# Altium PCB altium.PcbDoc (part 2 of 2)
Units mil, origin at the board's own origin, x right, y up, seen from the top; angles counter-clockwise.
Board outline 5119.1 x 2638.79 mil, 6 copper layers (TOP, L2_GND, L3_SIG, L4_VCC, L5_GND, BOTTOM), stack 61 mil thick; 336 components, 316 nets, 1351 pads, 0 vias.
Unrouted connection lines stored in the file: 850.
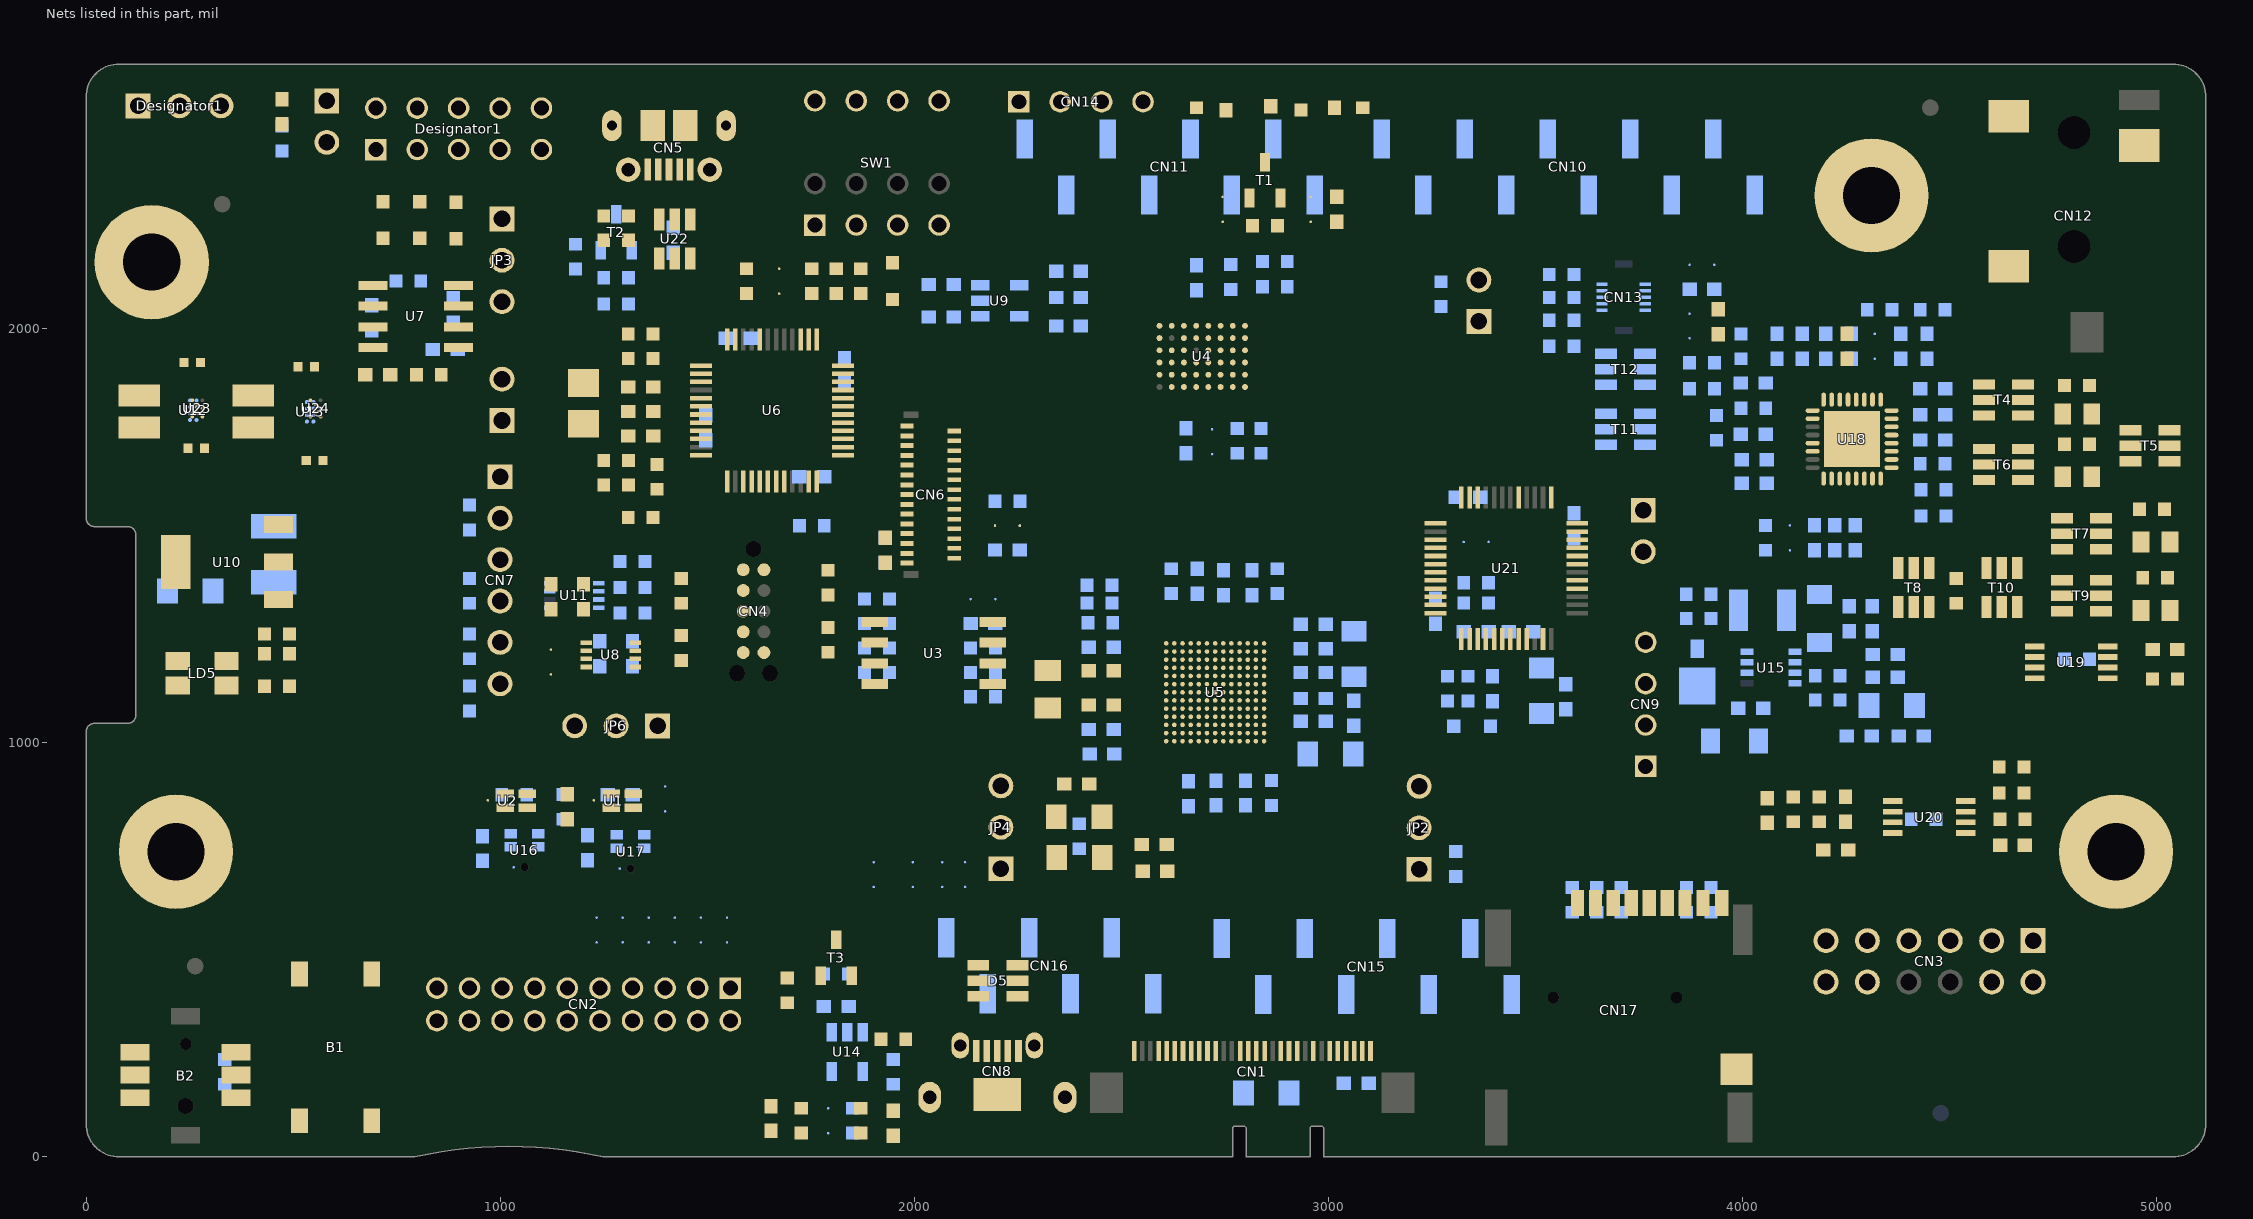
[diagram p2: the nets of this part, all layers, seen from the top]

## Footprints (in the part's own frame and the unit in brackets; to place one, negate y for a bottom-side part, rotate by r counter-clockwise, add the part's x,y. Pads: shape width x height; smd on the part's side, far side on the other; paste and mask are expansions set on the pad) (continued)
XTAL_2SM_3R2X2R5 [mil] "XTAL_2SM_3R2X2R5"
  rect 67x75 smd: 1(-49.21,0) 2(49.21,0)
  body extent -85,-50 85,50, height 150

## Part data
B1: library part "SW PUSHBUTTON", "SE Push Button TD-0341 [RESET/Black]", Manuf_1=Chau-hua, Manuf_2=wealthmetal, Manuf_Part_1=CTSM-644N-V-T/R, Assembly="with Back cap", ECCN_US/EU=NA, Manuf_Part_2=TD-0341X-A00, Ordered by=Subcon, Silkscreen=RESET
B2: library part MT-008A, "Joystick", Manuf_1=XIEJIA, Assembly="with button", ECCN_US/EU=NA, Manuf_Part_1=MT008-A, Ordered by=Subcon, Silkscreen=Joystick
C1 C2 C4 C5 C7 C10 C12 C14 C15 C16 C17 C18 C21 C22 C24 C25 C26 C27 C28 C29 C30 C31 C33 C34 C44 C46 C51 C58 C59 C60 C66 C71 C72 C73 C80 C81 C82 C83 C85 C86 C87 C88 C89 C90 C92 C93 C94 C95 C96 C97 C98 C101 C102 C103 C104 C105: library part Cap, "Capacitor,100nF,10%,16V,X7R,0603,YAGEO", Manuf_1=YAGEO, Manuf_Part_1=CC0603KRX7R7BB104, Ordered by=Subcon, Published=8-Jun-2000, Publisher="Altium Limited", Revision="July-2002: Re-released for DXP Platform."
C3 C62 C63 C99: library part Cap, "Capacitor,100nF,10%,16V,X7R,0603,YAGEO", Manuf_1=YAGEO, Manuf_Part_1=CC0603KRX7R7BB104, Ordered by=Subcon, Published=8-Jun-2000, Publisher="Altium Limited", Revision="July-2002: Re-released for DXP Platform."
C6: library part "Cap Pol1", "TAN Capacitor,4.7uF,10%,16V,A Type,AVX", Manuf_1=AVX, ECCN_US/EU=NA, Manuf_Part_1=TAJA475K016R, Ordered by=Subcon, Published=8-Jun-2000, Publisher="Altium Limited", Revision="July-2002: Re-released for DXP Platform."
C8 C13 C91 C100: library part "Cap Pol1", "Tan Capacitor,1uF,10%,16V,Tan-A,TAJA105K016R", Manuf_1=AVX, ECCN_US/EU=NA, Manuf_Part_1=TAJA105K016R, Ordered by=Subcon, Published=8-Jun-2000, Publisher="Altium Limited", Revision="July-2002: Re-released for DXP Platform."
C9 C11: library part Cap, "Capacitor,5.6pF,0.25P,50V,NPO,0603", Manuf_1=YAGEO, Ordered by=Subcon, Published=8-Jun-2000, Publisher="Altium Limited", Revision="July-2002: Re-released for DXP Platform."
C19 C32 C35 C67 C69 C70 C74 C77 C78 C79 C84: library part Cap, "Capacitor,1uF,0603,16V,10%,X5R,YAGEO", Manuf_1=YAGEO, Manuf_Part_1=CC0603KRX5R7BB105, Ordered by=Subcon, Published=8-Jun-2000, Publisher="Altium Limited", Revision="July-2002: Re-released for DXP Platform."
C20 C23: library part Cap, "Capacitor,10pF,5%,50V,NPO,0603,YAGEO", Manuf_1=YAGEO, Manuf_Part_1=CC0603JRNPO9BN100, Ordered by=Subcon, Published=8-Jun-2000, Publisher="Altium Limited", Revision="July-2002: Re-released for DXP Platform."
C36 C47 C57: library part Cap, "Capacitor,10nF,0603,50V,10%,X7R,YAGEO;", Manuf_1=YAGEO, Manuf_Part_1=CC0603KRX7R9BB103, Ordered by=Subcon, Published=8-Jun-2000, Publisher="Altium Limited", Revision="July-2002: Re-released for DXP Platform."
C37 C55 C61: library part "Cap Pol1", "TAN Capacitor,10uF,10%,16V,A Type,AVX", Manuf_1=AVX, ECCN_US/EU=NA, Manuf_Part_1=TAJA106K016R, Ordered by=Subcon, Published=8-Jun-2000, Publisher="Altium Limited", Revision="July-2002: Re-released for DXP Platform."
C40 C41 C42 C43: library part Cap, "Capacitor,10uF,0402,GRM155R60J106ME11", Manuf_1=Murata, Manuf_Part_1=GRM155R60J106ME11, Ordered by=Subcon, Published=8-Jun-2000, Publisher="Altium Limited", Revision="July-2002: Re-released for DXP Platform."
C45: library part "Cap Pol1", "Tan Capacitor,10uF,10%,25V,Tan-B,TAJB106K025RNJ", Manuf_1=AVX, ECCN_US/EU=NA, Manuf_Part_1=TAJB106K025RNJ, Ordered by=Subcon, Published=8-Jun-2000, Publisher="Altium Limited", Revision="July-2002: Re-released for DXP Platform."
C48: library part CAP, "Capacitor,4.7uF,50V,X7R,10%,1206", Manuf_1=YAGEO, ECCN_US/EU=NA, Manuf_Part_1=CC1206KKX7R9BB475, Ordered by=Subcon, Published=8-Jun-2000, Publisher="Altium Limited", Revision="July-2002: Re-released for DXP Platform."
C54: library part Cap, "Capacitor,4.7uF,16V, X5R,10%,0603", Manuf_1=YAGEO, Manuf_Part_1=CC0603KRX5R7BB475, Ordered by=Subcon, Published=8-Jun-2000, Publisher="Altium Limited", Revision="July-2002: Re-released for DXP Platform."
C56: library part "Cap Pol1", "Capacitor,4.7uF,±10%,X7R,10V,1206,GRM31CR71A475KA01L", Manuf_1=Murata, ECCN_US/EU=NA, Manuf_Part_1=GRM31CR71A475KA01L, Ordered by=Subcon, Published=8-Jun-2000, Publisher="Altium Limited", Revision="July-2002: Re-released for DXP Platform."
C64 C65: library part Cap, "Capacitor,150pF,0603,50V,5%,NPO", Manuf_1=YAGEO, ECCN_US/EU=NA, Manuf_Part_1=CC0603JRNPO9BN151, Ordered by=Subcon, Published=8-Jun-2000, Publisher="Altium Limited", Revision="July-2002: Re-released for DXP Platform."
C68: library part Cap, "Capacitor,10uF,10%,10V,X5R,0603,C1608X5R1A106KT000E", Manuf_1=TDK, ECCN_US/EU=NA, Manuf_Part_1=C1608X5R1A106KT000E, Ordered by=Subcon, Published=8-Jun-2000, Publisher="Altium Limited", Revision="July-2002: Re-released for DXP Platform."
C75 C76: library part Cap, "Capacitor,22nF,10%,25V,X7R,0603", Manuf_1=YAGEO, ECCN_US/EU=NA, Manuf_Part_1=CC0603KRX7R8BB223, Ordered by=Subcon, Published=8-Jun-2000, Publisher="Altium Limited", Revision="July-2002: Re-released for DXP Platform."
CN1: "TOWNES -  Connector FFC/FPC ZIF 0.5mm 30 pins, Lower Contacts", Manuf_1=TOWNES, Manuf_Part_2=TFP-A330ZH-BT1-ECX, Distrib="Sub Co", ECCN_US/EU=n/a, Manuf_2=TOWNES, Manuf_Part_1=FPU330ZH-BT1D3-CA, Ordered by=Subcon
CN2: library part "Header 10X2A", "Header, 10-Pin, Dual row", Manuf_1=ATOM, Manuf_Part_1=FH200210C-12000, Ordered by=Subcon
CN3: library part "Header 6X2A", "Header, 6-Pin, Dual row", Manuf_1=ATOM, Manuf_Part_1=FH254206C-1600, Ordered by=Subcon
CN4: "Footprint for TC2050-IDC-430 plug of nails (TM) cable for MP430", Manuf_1=None, Manuf_Part_1=None, Revision="17-Jul-2002: Re-released for DXP Platform."
CN5 CN8: Manuf_1=MOLEX, ECCN_US/EU=NA, Ordered by=Subcon
  CN5: Manuf_Part_1=1050170001, Silkscreen=USB
  CN8: Manuf_Part_1=475900001, Silkscreen=USB_USER
CN6: "29pins FPC connector", Manuf_1=Hirose, ECCN_US/EU=NA, Manuf_Part_1=FH26-29S-0.3SHW, Ordered by=Subcon
CN7: library part "Header 6", "Header, 6-Pin", Manuf_1=lyconn, ECCN_US/EU=NA, LatestRevisionDate=17-Jul-2002, LatestRevisionNote="Re-released for DXP Platform.", Manuf_Part_1=313106S111116, Ordered by=Subcon, Publisher="Altium Limited", Silkscreen=SWD
CN9 CN14: library part "Header 4", "Header, 4-Pin", ECCN_US/EU=[N/A], Publisher="Altium Limited", Revision="17-Jul-2002: Re-released for DXP Platform.", SOFER_FP=HDR_1X4_2R54
  CN9: Ordered by=Subcon
CN10: library part "Header 10X1_Female", "Header, 10-Pin, Single row,female", Manuf_1=SAMTEC, ECCN_US/EU=NA, LatestRevisionDate=17-Jul-2002, LatestRevisionNote="Re-released for DXP Platform.", Manuf_Part_1=SSW-110-22-X-S-VS, Ordered by=Subcon, Publisher="Altium Limited"
CN11 CN15: library part "Header 8X1_Female", "Header, 8-Pin, Single row,female", Manuf_1=SAMTEC, ECCN_US/EU=NA, LatestRevisionDate=17-Jul-2002, LatestRevisionNote="Re-released for DXP Platform.", Manuf_Part_1=SSW-108-22-X-S-VS, Ordered by=Subcon, Publisher="Altium Limited"
CN12: Manuf_1=QIAOD, ECCN_US/EU=NA, Manuf_Part_1=PJ3028B-3, Ordered by=Subcon, Silkscreen=AUDIO_JACK
CN13: library part "Header 5X2A", "Header, 5-Pin, Dual row", Manuf_1=Hirose, ECCN_US/EU=NA, LatestRevisionDate=17-Jul-2002, LatestRevisionNote="Re-released for DXP Platform.", Manuf_Part_1="DF37NB-10DS-0.4V (5x)", Ordered by=Subcon, Publisher="Altium Limited"
CN16: library part "Header 6X1_Female", "Header, 6-Pin, Single row,female", Manuf_1=SAMTEC, ECCN_US/EU=NA, LatestRevisionDate=17-Jul-2002, LatestRevisionNote="Re-released for DXP Platform.", Manuf_Part_1=SSW-106-22-X-S-VS, Ordered by=Subcon, Publisher="Altium Limited"
CN17: library part SMS016AFA5E, Manuf_1=Yamaichi, ECCN_US/EU=NA, Manuf_Part_1=PJS008-2000, Ordered by=Subcon, Silkscreen=uSD
D1 D3 D6 U22: Manuf_1=STM, Ordered by=STM
  D1 D3 D6: Distrib=ST, ECCN_US/EU=EAR99/NEC, Manuf_Part_1=BAT60JFILM, Order=BAT60JFILM, Provided=STM, Ref St=9151097, Revision="July-2002: Re-released for DXP Platform."
  U22: Manuf_Part_1=USBLC6-2SC6
D2 D4: library part BAT60JFILM, "BAT60JFILM", Manuf_1=STM, ECCN_US/EU=EAR99/NEC, Manuf_Part_1=BAT60JFILM, Order=BAT60JFILM, Ordered by=STM, Provided=STM, Ref St=9151097, Revision="July-2002: Re-released for DXP Platform."
  D2: Distrib=ST
  D4: Distrib=STM
D5: "4-line ESD protection", Manuf_1=STM, Manuf_Part_1=ESDA5V3L, Distrib=ST, ECCN_US/EU=EAR99/NEC, Order=ESDA5V3L, Ordered by=STM, Provided=ST, Ref St=9179034
Designator1 JP9 JP10: library part JP2, Manuf_1=lyconn, Manuf_Part_1=313102S111116, Assembly="with jumper", ECCN_US/EU=NA, Ordered by=Subcon
Designator1 JP3 JP6: library part Jumper3, Manuf_1=lyconn, Manuf_Part_1=313103S111116, Ordered by=Subcon
  Designator1 JP3: ECCN_US/EU=NA, Silkscreen="+3V3: pins 1&2 +1V8: pins 2&3"
Designator1: library part "Header 5X2M", "Pin Header male,2.54mm,2*5,L=11.6,180,1U,DIP", Manuf_1=Lyconn, Distrib="Sub Co", ECCN_US/EU=n/a, Ordered by=Subcon, SOFER_FP=HDR_2X5_2R54
Designator1: library part LED2, "LED,Orange,0603", Manuf_1=Everlight, Corlor=Orange, ECCN_US/EU=EAR99/NEC, Manuf_Part_1=19-217/S2C-AM2N2VY/3T, Ordered by=Subcon, Published=8-Jun-2000, Publisher="Altium Limited", Revision="July-2002: Re-released for DXP Platform."
Designator1 LD3 LD6 LD8: library part LED2, "LED,Green,0603", Manuf_1=Everlight, Corlor=Green, ECCN_US/EU=EAR99/NEC, Manuf_Part_1=19-213SY6C/S530-E2/TR8LED, Ordered by=Subcon, Published=8-Jun-2000, Publisher="Altium Limited", Revision="July-2002: Re-released for DXP Platform."
  LD8: Silkscreen=PWR
JP1: library part JP2, "2 PIN Jumper", Manuf_1=lyconn, Manuf_Part_1=313102S111116, Assembly="with jumper", ECCN_US/EU=[N/A], Ordered by=Subcon
JP2: library part Jumper3, "Jumper 3 pins", Manuf_1=lyconn, Manuf_Part_1=313103S111116, ECCN_US/EU=n/a, Ordered by=Subcon
JP4: Manuf_1=lyconn, Manuf_Part_1=313103S111116, ECCN_US/EU=NA, Ordered by=Subcon
L1 L4 L5 L6: library part Inductor, "100uH Bead", Manuf_1=Tai-tech, ECCN_US/EU=NA, Manuf_Part_1=FCM1608KF-601T03, Ordered by=Subcon, Published=8-Jun-2000, Publisher="Altium Limited", Revision="July-2002: Re-released for DXP Platform."
L2 L3: library part Inductor, "Inductor", Manuf_1=TDK, Manuf_Part_1=VLS252010HBX-2R2M-1, ECCN_US/EU=NA, Ordered by=Subcon, Published=8-Jun-2000, Publisher="Altium Limited", Revision="July-2002: Re-released for DXP Platform."
L7: library part Inductor, "IND,4.7uH,1A,1210,LQH32PN4R7NN0L", Manuf_1=Murata, ECCN_US/EU=NA, Manuf_Part_1=LQH32PN4R7NN0L, Ordered by=Subcon, Published=8-Jun-2000, Publisher="Altium Limited", Revision="July-2002: Re-released for DXP Platform."
L8: library part BEAD_600R_350MA_0603, "Bead,600R,350mA,0603,FCM1608KF-601T03,Tai-tech", Manuf_1=Tai-tech, Manuf_2=TDK, Manuf_Part_2=MPZ1608S300A, Comment_1=bead,30R,5A,0603,MPZ1608S300A,TDK, Manuf_Part_1=FCM1608KF-601T03, Order=FCM1608KF-601T03, Ordered by=Subcon, Revision="July-2002: Re-released for DXP Platform."
LD4 LD7: library part LED2, "LED, Red ,0603", Manuf_1=Everlight, Corlor=Red, ECCN_US/EU=EAR99/NEC, Manuf_Part_1=19-217/R6C-AL1M2VY/3T, Ordered by=Subcon, Published=8-Jun-2000, Publisher="Altium Limited", Revision="July-2002: Re-released for DXP Platform."
  LD4: Silkscreen=Fault
LD5: library part LD_BICOLOR_CMS, "Bicolor Led", Manuf_1="Avago Technologies", Manuf_2=everluck, Manuf_Part_2=LE-RGW35280, Distrib=RADIOSPARES, ECCN_US/EU=EAR99/NEC, Manuf_Part_1=HSMF-A201-A00J1, Ordered by=Subcon, Silkscreen=COM
R1: library part res1, "Resistor,680R,0603,1%,YAGEO", Manuf_1=YAGEO, ECCN_US/EU=NA, Manuf_Part_1=RC0603FR-07680RL, Ordered by=Subcon, Published=8-Jun-2000, Publisher="Altium Limited", Revision="July-2002: Re-released for DXP Platform."
R2 R112: library part res1, "Resistor,510R,0603,1%,YAGEO", Manuf_1=YAGEO, ECCN_US/EU=NA, Manuf_Part_1=RC0603FR-07510RL, Ordered by=Subcon, Published=8-Jun-2000, Publisher="Altium Limited", Revision="July-2002: Re-released for DXP Platform."
R4 R5 R16 R25 R35 R56 R59 R60 R63 R66 R69 R71 R102: library part res1, "Resistor, 100 ,0603,1%,YAGEO", Manuf_1=YAGEO, ECCN_US/EU=NA, Manuf_Part_1=RC0603JR-07100RL, Ordered by=Subcon, Published=8-Jun-2000, Publisher="Altium Limited", Revision="July-2002: Re-released for DXP Platform."
R6 R7 R8 R26 R28 R29 R100: library part res1, "Resistor, 22 ,0603,1%,YAGEO", Manuf_1=YAGEO, ECCN_US/EU=NA, Manuf_Part_1=RC0603JR-0722RL, Ordered by=Subcon, Published=8-Jun-2000, Publisher="Altium Limited", Revision="July-2002: Re-released for DXP Platform."
R12 R18 R130: library part res1, "Resistor, 0 ,0603,1%,YAGEO", Manuf_1=YAGEO, Manuf_Part_1=RC0603JR-070RL, ECCN_US/EU=NA, Ordered by=Subcon, Published=8-Jun-2000, Publisher="Altium Limited", Revision="July-2002: Re-released for DXP Platform."
R13 R14 R15 R17 R20 R33 R48 R52 R53 R54 R73 R76 R81 R84 R94 R106 R109 R110 R115 R116 R117: library part res1, "Resistor,100K,0603,1%,YAGEO", Manuf_1=YAGEO, ECCN_US/EU=NA, Manuf_Part_1=RC0603FR-07100KL, Ordered by=Subcon, Published=8-Jun-2000, Publisher="Altium Limited", Revision="July-2002: Re-released for DXP Platform."
R21 R31 R41 R77 R89 R99 R104: library part res1, "Resistor,100K,0603,1%,YAGEO", Manuf_1=YAGEO, Manuf_Part_1=RC0603FR-07100KL, Ordered by=Subcon, Published=8-Jun-2000, Publisher="Altium Limited", Revision="July-2002: Re-released for DXP Platform."
  R21 R77 R89 R99 R104: ECCN_US/EU=NA
  R31 R41: ECCN_US/EU=[N/A]
R22 R45 R49: library part res1, "Resistor,4.7K,0603,1%,YAGEO", Manuf_1=YAGEO, ECCN_US/EU=NA, Manuf_Part_1=RC0603FR-074K7L, Ordered by=Subcon, Published=8-Jun-2000, Publisher="Altium Limited", Revision="July-2002: Re-released for DXP Platform."
R23: library part res1, "Resistor,2.7K,0603,1%,YAGEO", Manuf_1=YAGEO, ECCN_US/EU=NA, Manuf_Part_1=RC0603FR-072K7L, Ordered by=Subcon, Published=8-Jun-2000, Publisher="Altium Limited", Revision="July-2002: Re-released for DXP Platform."
R24: library part Res_0_5%_0402, "Resistor,0,0603,5%,YAGEO", Manuf_1=YAGEO, Manuf_Part_1=RC0603JR-070RL, Distrib=FARNELL, ECCN_US/EU=[N/A], Ordered by=Subcon
R27 R30 R32 R44 R78 R83 R91 R113: library part res1, "Resistor,10K,0603,1%,YAGEO", Manuf_1=YAGEO, ECCN_US/EU=NA, Manuf_Part_1=RC0603FR-0710KL, Ordered by=Subcon, Published=8-Jun-2000, Publisher="Altium Limited", Revision="July-2002: Re-released for DXP Platform."
R34: library part res1, "Resistor,36K,0603,1%,YAGEO", Manuf_1=YAGEO, ECCN_US/EU=NA, Manuf_Part_1=RC0603FR-0736KL, Ordered by=Subcon, Published=8-Jun-2000, Publisher="Altium Limited", Revision="July-2002: Re-released for DXP Platform."
R36 R68: library part res1, "Resistor", Manuf_1=YAGEO, Manuf_Part_1=RC0603FR-07820RL, ECCN_US/EU=NA, Ordered by=Subcon, Published=8-Jun-2000, Publisher="Altium Limited", Revision="July-2002: Re-released for DXP Platform."
R37 R42 R43: library part res1, "Resistor,1.5K,0603,1%,YAGEO", Manuf_1=YAGEO, ECCN_US/EU=NA, Manuf_Part_1=RC0603FR-071K5L, Ordered by=Subcon, Published=8-Jun-2000, Publisher="Altium Limited", Revision="July-2002: Re-released for DXP Platform."
R46 R47 R51 R55 R57 R70 R80 R93 R105 R114 R129: library part res1, "Resistor, 0 ,0603,1%,YAGEO", Manuf_1=YAGEO, ECCN_US/EU=NA, Manuf_Part_1=RC0603JR-070RL, Ordered by=Subcon, Published=8-Jun-2000, Publisher="Altium Limited", Revision="July-2002: Re-released for DXP Platform."
R50 R82: library part res1, "Resistor,2.2K,0603,1%,YAGEO", Manuf_1=YAGEO, ECCN_US/EU=NA, Manuf_Part_1=RC0603FR-072K2L, Ordered by=Subcon, Published=8-Jun-2000, Publisher="Altium Limited", Revision="July-2002: Re-released for DXP Platform."
R58 R62 R64: library part res1, "Resistor, 47K,0603,1%,YAGEO", Manuf_1=YAGEO, ECCN_US/EU=NA, Manuf_Part_1=RC0603JR-0747KL, Ordered by=Subcon, Published=8-Jun-2000, Publisher="Altium Limited", Revision="July-2002: Re-released for DXP Platform."
R65: library part res1, "Resistor, 10K,0603,1%,YAGEO", Manuf_1=YAGEO, ECCN_US/EU=NA, Manuf_Part_1=RC0603JR-0710KL, Ordered by=Subcon, Published=8-Jun-2000, Publisher="Altium Limited", Revision="July-2002: Re-released for DXP Platform."
R67: library part res1, "Resistor,10R,0603,1%,YAGEO", Manuf_1=YAGEO, ECCN_US/EU=NA, Manuf_Part_1=RC0603FR-0710RL, Ordered by=Subcon, Published=8-Jun-2000, Publisher="Altium Limited", Revision="July-2002: Re-released for DXP Platform."
R72: library part res1, "Resistor,1K,0603,1%", Manuf_1=YAGEO, Manuf_Part_1=RC0603FR-071KL, ECCN_US/EU=NA, Ordered by=Subcon, Published=8-Jun-2000, Publisher="Altium Limited", Revision="July-2002: Re-released for DXP Platform."
R74: library part res1, "Resistor, 330R , 0603,1%,YAGEO", Manuf_1=YAGEO, ECCN_US/EU=NA, Manuf_Part_1=RC0603JR-07330RL, Ordered by=Subcon, Published=8-Jun-2000, Publisher="Altium Limited", Revision="July-2002: Re-released for DXP Platform."
R75: library part res1, "Resistor, 620R , 0603,1%,YAGEO", Manuf_1=YAGEO, ECCN_US/EU=NA, Manuf_Part_1=RC0603JR-07620RL, Ordered by=Subcon, Published=8-Jun-2000, Publisher="Altium Limited", Revision="July-2002: Re-released for DXP Platform."
R79: library part res1, "Resistor,10K,0603,1%,YAGEO", Manuf_1=YAGEO, Manuf_Part_1=RC0603FR-0710KL, ECCN_US/EU=[N/A], Ordered by=Subcon, Published=8-Jun-2000, Publisher="Altium Limited", Revision="July-2002: Re-released for DXP Platform."
R85: library part Res_1_1%_0805, "Resistor,1,0805,1%,YAGEO", Manuf_1=YAGEO, Manuf_Part_1=RC0805FR-071RL, ECCN_US/EU=n/a, Order=RC0805FR-071RL, Ordered by=Subcon
R86 R90: library part res1, "Resistor,50R,0603,1%,YAGEO", Manuf_1=YAGEO, ECCN_US/EU=NA, Manuf_Part_1=RC0603FR-0750RL, Ordered by=Subcon, Published=8-Jun-2000, Publisher="Altium Limited", Revision="July-2002: Re-released for DXP Platform."
R87 R88: library part res1, "Resistor,1.5K,0603,1%,YAGEO", Manuf_1=YAGEO, Manuf_Part_1=RC0603FR-071K5L, ECCN_US/EU=NA, Ordered by=Subcon, Published=8-Jun-2000, Publisher="Altium Limited", Revision="July-2002: Re-released for DXP Platform."
R92 R96: library part res1, "Resistor,6.04K,0603,1%,YAGEO", Manuf_1=YAGEO, ECCN_US/EU=NA, Manuf_Part_1=RC0603FR-076K04L, Ordered by=Subcon, Published=8-Jun-2000, Publisher="Altium Limited", Revision="July-2002: Re-released for DXP Platform."
R95: library part Res_10K_1%_0805, "Resistor,10K,0805,1%,YAGEO", Manuf_1=YAGEO, Manuf_Part_1=RC0805FR-0710KL, ECCN_US/EU=n/a, Order=RC0805FR-0710KL, Ordered by=Subcon
R97 R103: library part res1, "Resistor,300K,0603,1%,YAGEO", Manuf_1=YAGEO, ECCN_US/EU=NA, Manuf_Part_1=RC0603FR-07300KL, Ordered by=Subcon, Published=8-Jun-2000, Publisher="Altium Limited", Revision="July-2002: Re-released for DXP Platform."
R98: library part res1, "Resistor,11K,0603,1%,YAGEO", Manuf_1=YAGEO, ECCN_US/EU=NA, Manuf_Part_1=RC0603FR-0711KL, Ordered by=Subcon, Published=8-Jun-2000, Publisher="Altium Limited", Revision="July-2002: Re-released for DXP Platform."
R101: library part res1, "Resistor,357K,0603,1%,YAGEO", Manuf_1=YAGEO, ECCN_US/EU=NA, Manuf_Part_1=RC0603FR-07357KL, Ordered by=Subcon, Published=8-Jun-2000, Publisher="Altium Limited", Revision="July-2002: Re-released for DXP Platform."
R107: library part Res_24_1%_0805, "Resistor,24,0805,1%,YAGEO", Manuf_1=YAGEO, Manuf_Part_1=RC0805FR-0724RL, ECCN_US/EU=n/a, Order=RC0805FR-0724RL, Ordered by=Subcon
R111: library part Res_620_1%_0805, "Resistor,620,0805,1%,YAGEO", Manuf_1=YAGEO, Manuf_Part_1=RC0805FR-07620RL, ECCN_US/EU=n/a, Order=RC0805FR-07620RL, Ordered by=Subcon
R118 R119 R120 R121 R122: library part res1, "Resistor,47K,0603,1%,YAGEO", Manuf_1=YAGEO, Manuf_Part_1=RC0603FR-0747KL, ECCN_US/EU=NA, Ordered by=Subcon, Published=8-Jun-2000, Publisher="Altium Limited", Revision="July-2002: Re-released for DXP Platform."
R123: library part res1, "Resistor, 510R , 0603,1%,YAGEO", Manuf_1=YAGEO, ECCN_US/EU=NA, Manuf_Part_1=RC0603JR-07510RL, Ordered by=Subcon, Published=8-Jun-2000, Publisher="Altium Limited", Revision="July-2002: Re-released for DXP Platform."
R124: library part res1, "Resistor, 1M , 0603", ECCN_US/EU=NA, Ordered by=Subcon, Published=8-Jun-2000, Publisher="Altium Limited", Revision="July-2002: Re-released for DXP Platform."
SB1 SB3 SB6 SB7 SB8 SB12 SB13 SB14 SB16 SB17 SB18 SB19 SB20 SB21 SB24 SB26 SB28: library part SB_ON, Manuf_1=YAGEO, Manuf_Part_1=RC0603JR-070RL, ECCN_US/EU=N/A, Ordered by=Subcon, Revision="July-2002: Re-released for DXP Platform.", Solder=YES
SB2 SB4 SB5 SB9 SB11 SB15 SB22 SB25 SB27: library part SB_OFF, ECCN_US/EU=N/A, Revision="July-2002: Re-released for DXP Platform.", Solder=NO
SW1: "Gold Plated Contacts,4PST,1x4 Switch", Manuf_1="Grayhill Inc", Manuf_Part_1=EDG-501S, Ordered by=Subcon, Second Source=NDS-04-V
T1: library part 2N7000, Manuf_1=NXP, ECCN_US/EU=N/A, Manuf_Part_1=BSN20BK, Ordered by=Subcon
T2 T3: library part NPN, "NPN Bipolar Transistor", Manuf_Part_1=MMBT9013, Code - JEDEC=TO-226-AA, ECCN_US/EU=EAR99/NEC, Ordered by=Subcon, Published=8-Jun-2000, Publisher="Altium Limited", Revision="July-2002: Re-released for DXP Platform."
T4 T5 T6 T7 T8 T9 T10 T11 T12: "STripFET VII DeepGATE Power MOSFET, P-CHANNEL 20 V, 0.0146, 7 A - SOT23-6L", Manuf_1=STM, Distrib=ST, ECCN_US/EU=EAR99/NEC, Manuf_Part_1=STT7P2UH7, Order=STT7P2UH7, Ordered by=STM, Provided=ST, Ref St=xxxxxxxx
  T4: Comments="exclusive with T8"
  T5 T6 T8 T10 T11 T12: Comments="exclusive with T2"
  T7: Comments="exclusive with T3"
  T9: Comments="exclusive with T4"
U1 U2: library part MP34DT01TR, "MEMS audio sensor", Manuf_1=STM, ECCN_US/EU=EAR99/NEC, Manuf_Part_1=MP34DT01TR-M, Ordered by=STM, Publisher="Altium Limited", Ref St=9188008, Revision="17-Jul-2002: Re-released for DXP Platform."
U3: "Ultra Low Power 64M-BIT CMOS MXSMIO FLASH MEMORY", Manuf_1=MXIC, Manuf_Part_1=MX25R6435FM2IL0, Ordered by=Subcon
U4: "8M Bit static RAMs organized as 512K words by  16 bits.", Manuf_1=ISSI, Manuf_Part_1=IS66WV51216EBLL-70BLI, Ordered by=STM
U5: library part STM32L496G, Manuf_1=STM, ECCN_US/EU=3A991A2/NEC, Manuf_Part_1=STM32L496AG, Ordered by=STM, Ref St=TBD
U6: library part STM32F10x(48pin), "IC,STM32F103CBT6,LQFP-48", Manuf_1=STM, Distrib=ST, ECCN_US/EU=3A991A2/NEC, Manuf_Part_1=STM32F103CBT6, Ordered by=STM, Ref St=9175111
U7: Manuf_1=ST, Manuf_Part_1=ST890CDR, Ordered by=STM
U8 U11: Manuf_1=TI, ECCN_US/EU=EAR99/NEC, Manuf_Part_1=SN74LVC2T45DCUT, Ordered by=Subcon
U9: "Ultra low drop-low noise BiCMOS voltage, regulators low ESR capacitors compatible", Manuf_1=STM, Manuf_Part_2=LDK120DM33R, Distrib=STM, ECCN_US/EU=EAR99/NEC, Manuf_2=STM, Manuf_Part_1=LD3985M33R, Order=LD3985M33R, Ordered by=STM, Provided=STM, Ref St=9176161
U10: library part LD1117S18TR, "Adjustable and fixed low drop positive voltage regulator", Manuf_1=STM, Manuf_Part_1=LD1117S50TR, Ordered by=STM
U12 U13: "High Efficiency Buck Converter", Manuf_1=TI, ECCN_US/EU=N/A, Manuf_Part_1=TPS62743, Ordered by=Subcon
U14: "Enhanced single channel power switches", Manuf_1=ST, Distrib=ST, ECCN_US/EU=EAR99/NEC, Manuf_Part_1=STMPS2141STR, Order=STMPS2141STR, Ordered by=STM, Provided=ST, Ref St=9159003
U15: library part STLD40DPMR, Manuf_1=ST, ECCN_US/EU=EAR99/NEC, Manuf_Part_1=STLD40DPUR, Ordered by=STM, Ref St=9176009
U16 U17: library part MP23DB01MM, "MEMS micro", Manuf_1=STM, ECCN_US/EU=EAR99/NEC, Fitted=NO, Manuf_Part_1=MP23DB01MM, Ordered by=STM, Publisher=STM, Ref St=9188010
U18: "Low-Power, Stereo Codec with Headphone Amp", Manuf_1=Cirrus, Manuf_Part_1=CS42L51-CNZ, Ordered by=Subcon
U19 U20: "Very high accuracy (5 ?) zero drift 5 V dual OpAmp", Manuf_1=STM, Distrib=ST, ECCN_US/EU=EAR99/NEC, Manuf_Part_1=TSZ122IST, Order=TSZ122IST, Ordered by=STM, Provided=ST, Ref St=xxxxxxxxx
U21: library part MFX, "Multifunction expander", Manuf_1=STM, Manuf_Part_1=STM32L152CCT6, Ordered by=STM
U23 U24: "400mA NanoQuiescent Step Down converter", Manuf_1=STM, Manuf_Part_1=ST1PS01EJR, Ordered by=STM
X1: library part CRYSTAL_32K, "32.768kHz Crystal", Manuf_1=NDK, Manuf_Part_1=NX3215SA-32.768KHZ-EXS00A-MU00525, ECCN_US/EU=EAR99/NEC, Ordered by=STM, Ref St=9157034
X2: library part XTAL_8M_NX3225GD, "Crystal 8Mhz, 8pF, -+50PPM, SMD", Manuf_1=NDK, Manuf_Part_1="NX3225GD 8MHz EXS00A-CG04874", Manuf_Part_2=NX3225GD-8.000M-STD-CRA-3, ECCN_US/EU=EAR99/NEC, NDK Ref=X3127326, Order="NX3225GD 8MHz EXS00A-CG04874", Ordered by=STM, Provided=ST, Ref St=9157029
Z1: library part "D Schottky", "Schottky Diode", Manuf_1=STM, Code - JEDEC=DO-214-AA, ECCN_US/EU=EAR99/NEC, Manuf_Part_1=STPS1L40M, Ordered by=STM, Published=8-Jun-2000, Publisher="Altium Limited", Ref St=9151085, Revision="July-2002: Re-released for DXP Platform."

## Free pads (board coordinates)
  round 40 smd far side mask+40: 1(263.1,460) 1(4453.1,2533) ""(4478.1,105)
  round 40 smd mask+40: ""(263.1,460) ""(328.1,2300) ""(4453.1,2533)

## Nets (pads, with @x,y where several pads share a name; then routed paths per layer and width w, separated by ;. In a path a pad name is that pad's centre, name@x,y a point inside that pad or via, vN(x,y) a via of type N, cw(c..) or ccw(c..) an arc to the next point about the centre after c; other vN are vias at no path point)
1V8_CODEC: C5.1 C72.1 C73.1 C74.1 C77.1 SB19.2 U18.5 U18.12 U18.27
1V8_OUT: C41.1 Designator1.3@325.2,2537.4 L3.2 SB19.1 U13.C2 U24.E3
1V8_SW: L3.1 U13.A1 U24.C3
3V3_LCD: C44.1 CN6.26 R99.2 R130.2 SB20.1 T12.1 T12.2 T12.5 T12.6
3V3_OUT: C40.1 CN3.6 CN3.12 CN15.4 Designator1.1@125.2,2537.4 Designator1.1@2860.24,2536.93 Designator1.1@3014.17,2532.99 JP4.1 L2.2 R64.1 R74.1 R75.1 R77.2 R123.1 T12.4 U12.C2 U23.E3
3V3_SW: L2.1 U12.A1 U23.C3
5V_STL: D1.1 R24.2 SW1.3
5V_USB_CHARGER: C19.2 C105.1 CN5.1 D3.1 Designator1.9 R32.1 R36.2 R44.1 U7.1 U7.2 U22.5
+3V3_ST_LINK: C30.2 C31.1 C32.1 C51.2 C86.1 C87.1 C92.1 C96.1 CN14.1 R41.1 R70.1 SB11.1 T2.3 U6.1 U6.9 U6.24 U6.36 U6.48 U8.1 U9.5 U11.8
+5V: C42.1 C43.1 CN2.6 CN2.15 Designator1.1@580.71,2549.21 Designator1.2@699.22,2531.89 Designator1.4 Designator1.6 Designator1.8 Designator1.10 JP3.1 L5.1 R58.1 R115.1 R116.2 SB16.1 SW1.6 T10.4 U12.A2 U12.B1 U12.C1 U12.D1 U12.D2 U13.A2 U13.B1 U13.D1 U23.A1 U23.A3 U23.B2 U23.C1 U24.A3 U24.B2
AGND: C5.2 C64.2 C65.2 C66.1 C68.1 C69.1 C70.1 C72.2 C77.2 C79.1 CN12.3 R80.2 R81.2 R86.2 R90.2 U18.7 U18.13
AIN_1: R41.2 R45.1 R49.1 U6.10
AMP_5V: C83.2 R105.2 T10.1 T10.2 T10.5 T10.6 U19.8
AMP_VDD: C90.1 T8.1 T8.2 T8.5 T8.6 U20.8
ARD_5V: CN15.5 JP3.2
ARD_A0: CN16.1 U5.H5
ARD_A1: CN16.2 U5.J3
ARD_A2: CN16.3 U5.K1
ARD_A3: CN16.4 U5.H4
ARD_A4: SB26.1 U5.N2
ARD_A5: SB28.1 U5.J2
ARD_D0: CN11.1 U5.H9
ARD_D1: CN11.2 U5.H10
ARD_D2: CN11.3 U5.G7
ARD_D3: CN11.4 U5.B12
ARD_D4: CN11.5 U5.C3
ARD_D5: CN11.6 U5.D4
ARD_D6: CN11.7 U5.B9
ARD_D7: CN11.8 U5.G11
ARD_D8: CN10.1 U5.C6
ARD_D9: CN10.2 U5.C9
ARD_D10: CN10.3 U5.A9
ARD_D11: CN10.4 U5.B5
ARD_D12: CN10.5 U5.A5
ARD_D13: CN10.6 SB1.2 U5.K4
ARD_D14: CN2.10 CN10.9 SB25.1 U5.D5
ARD_D15: CN2.7 CN10.10 SB27.1 U5.C4
AUDIO_RST: R83.2 U5.F11 U18.25
BLGND: C47.2 C48.2 C55.2 C56.2 C57.2 C58.2 C59.2 L4.2 R67.2 R73.2 R76.2 U15.3 U15.9
BOOT0: R20.2 R21.2 U5.E5
CAL: R94.1 T6.3 U21.3
CAL_D: R95.2 T6.1 T6.2 T6.5 T6.6 T7.4 T9.4 U19.3
CAMERA_CLK: CN1.21 R100.1
CKOUT: CN2.18 CN2.20 U1.3 U2.3 U5.J4 U16.4 U17.4
CTP_INT: CN13.2 R89.1 U5.G6
D0: CN6.18 U4.B6 U5.K10
D1: CN6.17 U4.C5 U5.H11
D2: CN6.16 U4.C6 U5.B8
D3: CN6.15 U4.D5 U5.C8
D4: CN6.14 U4.E5 U5.L7
D5: CN6.13 U4.F5 U5.K7
D6: CN6.12 U4.F6 U5.J7
D7: CN6.11 U4.G6 U5.H7
D8: CN6.10 U4.B1 U5.N8
D9: CN6.9 U4.C1 U5.M8
D10: CN6.8 U4.C2 U5.L8
D11: CN6.7 U4.D2 U5.K8
D12: CN6.6 U4.E2 U5.J8
D13: CN6.5 U4.F2 U5.L11
D14: CN6.4 U4.F1 U5.L10
D15: CN6.3 U4.G1 U5.J13
D_N: CN8.2 D5.4 U5.E13
D_P: CN8.3 D5.3 U5.D13
DATIN3: CN2.17 SB17.2 U5.G12
DCMI_CLK: R100.2 U5.G8
DCMI_D0: CN1.4 U5.D11
DCMI_D1: CN1.5 U5.M9
DCMI_D2: CN1.6 U5.M10
DCMI_D3: CN1.7 U5.B13
DCMI_D4: CN1.8 U5.A13
DCMI_D5: CN1.9 U5.D10
DCMI_D6: CN1.10 U5.E4
DCMI_D7: CN1.11 U5.B2
DCMI_HSYNC: CN1.17 U5.N10
DCMI_I2C2_SCL: CN1.28 CN13.5 R42.2 R88.2 U5.K9 U18.3 U21.42
DCMI_I2C2_SDA: CN1.27 CN13.4 R43.2 R87.1 U5.M13 U18.2 U21.43
DCMI_NRST: B1.1 B1.4 C10.1 CN1.26 CN15.3 D6.2 R25.2 SW1.7 U5.H3
DCMI_PIXCK: CN1.15 U5.L9
DCMI_PWR_EN: CN1.25 U21.16
DCMI_VSYNC: CN1.19 U5.E10
DFDATIN1: CN2.19 U5.N12
E5V: C37.1 D2.1 Designator1.3@799.22,2431.89 R72.1 U10.2 U10.4
GND: B1.2 B1.3 C1.2 C2.2 C3.2 C4.2 C6.2 C7.2 C8.2 C9.1 C10.2 C11.1 C12.2 C13.2 C14.2 C15.2 C16.2 C17.2 C18.2 C19.1 C20.1 C21.2 C22.2 C23.1 C24.2 C25.2 C26.2 C27.2 C28.2 C29.1 C30.1 C31.2 C32.2 C33.2 C34.2 C35.2 C36.2 C37.2 C40.2 C41.2 C42.2 C43.2 C44.2 C45.2 C46.2 C51.1 C54.2 C60.2 C61.2 C62.2 C63.2 C71.1 C73.2 C74.2 C80.2 C81.2 C82.2 C83.1 C84.2 C85.1 C86.2 C87.2 C89.2 C90.2 C91.2 C92.2 C93.2 C94.2 C95.2 C96.2 C97.2 C98.2 C99.1 C100.2 C101.2 C102.2 C103.2 C104.2 C105.2 CN1.1 CN1.14 CN1.16 CN1.23 CN1.29 CN2.5 CN2.16 CN3.5 CN3.11 CN4.3 CN4.5 CN5.5 CN5.6 CN5.7 CN5.8 CN5.9 CN5.10 CN5.11 CN6.1 CN6.27 CN7.3 CN8.5 CN8.6 CN8.7 CN8.8 CN8.9 CN8.10 CN9.3 CN10.7 CN13.1 CN13.3 CN13.6 CN13.10 CN14.3 CN15.6 CN15.7 CN17.6 CN17.9 D5.2 D5.5 H1.1 H2.1 H3.1 H4.1 JP10.2 L4.1 LD5.1 LD8.2 R17.2 R20.1 R22.1 R30.1 R31.1 R33.1 R34.2 R48.1 R49.2 R50.1 R65.1 R80.1 R83.1 R84.1 R89.2 R91.1 R98.2 R104.2 R106.1 R109.1 R110.1 R112.2 R113.2 R124.2 SB15.1 SB22.1 T1.2 T3.2 U1.2 U1.5 U2.5 U3.4 U4.D1 U4.E6 U5.A7 U5.B3 U5.C2 U5.C12 U5.F2 U5.F13 U5.H2 U5.H12 U5.K2 U5.L13 U5.M1 U5.M3 U5.M7 U5.M11 U5.N4 U6.8 U6.23 U6.35 U6.47 U7.4 U8.4 U8.5 U9.2 U10.1 U11.4 U12.B2 U13.B2 U13.C1 U13.D2 U14.2 U16.3 U17.2 U17.3 U18.28 U18.33 U19.4 U20.4 U21.8 U21.23 U21.35 U21.47 U22.2 U23.D2 U24.A1 U24.C1 U24.D2
IDD_MEAS: C84.1 R102.1 U21.25
JOY_DOWN: B2.3 U5.A1
JOY_LEFT: B2.1 U5.B1
JOY_RIGHT: B2.4 U5.M5
JOY_SEL: B2.2 U5.E1
JOY_UP: B2.6 U5.C11
LCD_BL: R76.1 R77.1 U5.A12 U15.7
LCD_NE: CN6.22 R52.1 U5.F7
LCD_OE: CN6.19 U4.A2 U5.C7
LCD_PWR_ON: R115.2 T11.3 T12.3 U5.H1
LCD_RST: CN6.23 R117.2 U21.20
LCD_TE: CN6.2 U5.D12
LCD_WE: CN6.20 U4.G5 U5.D7
LED1: R2.1 U5.N13
LED_STLINK: R69.1 R71.1 U6.30
LEDA: C47.1 C48.1 CN6.28 U15.6 Z1.2
LEDK: CN6.29 R67.1 U15.4
MCO: U6.29
MFX_AGPIO1: R116.1 T5.3 T8.3 T10.3 U21.11
MFX_IRQ_OUT: U5.J5 U21.46
MFX_SWCLK: CN9.2 U21.37
MFX_SWDIO: CN9.4 U21.34
MFX_WAKEUP: R109.2 U5.E11 U21.2
MIC_VDD: C1.1 C2.1 C62.1 C63.1 R78.2 R79.2 U1.1 U2.1 U5.J1 U16.5 U17.5
NETB2_5: B2.5 R60.2
NETC4_1: C4.1 SB3.2 U3.8
NETC9_2: C9.2 U5.F1 X1.1
NETC11_2: C11.2 U5.G1 X1.2
NETC15_1: C15.1 C16.1 SB12.1 U4.D6 U4.E1
NETC33_1: C33.1 C35.1 D2.2 D3.2 D4.2 U9.1 U9.3
NETC36_1: C36.1 U9.4
NETC55_1: C55.1 C59.1 L5.2 L6.1
NETC64_1: C64.1 U18.22
NETC65_1: C65.1 U18.21
NETC66_2: C66.2 R82.2 U18.18
NETC67_1: C67.1 R81.1 R82.1
NETC67_2: C67.2 U18.17
NETC68_2: C68.2 U18.16
NETC69_2: C69.2 U18.15
NETC70_2: C70.2 U18.14
NETC71_2: C71.2 SB18.2 U18.26
NETC75_1: C75.1 CN12.6 U18.11
NETC75_2: C75.2 R86.1
NETC76_1: C76.1 CN12.4 U18.10
NETC76_2: C76.2 R90.1
NETC78_1: C78.1 U18.8
NETC78_2: C78.2 U18.6
NETC79_2: C79.2 U18.9
NETC80_1: C80.1 CN13.9 SB20.2
NETC85_2: C85.2 R98.1 R101.2 U20.3
NETC88_1: C88.1 R92.1 R103.1 U20.6
NETC88_2: C88.2 R102.2 R103.2 U20.7
NETC91_1: C91.1 C94.1 L8.2 U21.9
NETC95_1: C95.1 C100.1 JP4.2 L1.1 U5.E12
NETC99_2: C99.2 D6.1 U21.7
NETCN4_2: CN4.2 R5.1
NETCN4_4: CN4.4 R4.1
NETCN4_6: CN4.6 R16.1
NETCN4_10: CN4.10 R25.1
NETCN5_4: CN5.4 R33.2
NETCN6_24: CN6.24 SB14.2 SB15.2
NETCN7_1: CN7.1 JP6.3
NETCN7_2: CN7.2 R66.1
NETCN7_4: CN7.4 R63.1
NETCN7_5: CN7.5 R59.1
NETCN7_6: CN7.6 R56.1
NETCN10_8: CN10.8 SB2.1
NETCN13_7: CN13.7 R99.1 R104.1 U21.19
NETCN13_8: CN13.8 SB21.1 SB22.2
NETCN15_1: CN15.1 R72.2
NETCN16_5: CN16.5 SB25.2 SB26.2
NETCN16_6: CN16.6 SB27.2 SB28.2
NETD1_2: D1.2 R23.2 R24.1
NETJP1_1: JP1.1 U21.22
NETJP1_2: JP1.2 U21.21
NETJP3_3: Designator1.7 JP3.3
NETJP6_1: JP6.1 SW1.4
NETJP8_2: Designator1.2@580.71,2449.21 R68.2
NETJP9_2: JP9.2 R12.1 R14.1 U4.B5
NETL7_2: L7.2 U15.8 Z1.1
NETLD1_2: 
NETLD2_2: 
NETLD3_1: 
NETLD3_2: LD3.2 T1.3
NETLD4_1: LD4.1 R36.1
NETLD4_2: LD4.2 U7.8
NETLD5_2: LD5.2 R71.2
NETLD5_3: LD5.3 R69.2
NETLD5_4: LD5.4 R70.2
NETLD6_1: LD6.1 R74.2
NETLD6_2: LD6.2 T3.3
NETLD7_1: LD7.1 R75.2
NETLD8_1: LD8.1 R68.1
NETR1_1: R1.1 U21.40
NETR6_2: R6.2 U3.7
NETR7_2: R7.2 U3.6
NETR8_2: R8.2 U3.5
NETR15_2: R15.2 U4.A6
NETR17_1: R17.1 U6.44
NETR22_2: R22.2 R23.1 SB11.2 U6.39
NETR26_2: R26.2 R27.1 U3.1
NETR28_2: R28.2 U3.2
NETR29_2: R29.2 U3.3
NETR30_2: R30.2 U6.2
NETR31_2: R31.2 U6.3
NETR34_1: R34.1 R35.1 R44.2 T2.1
NETR37_1: R37.1 T2.2
NETR48_2: R48.2 U6.20
NETR50_2: R50.2 U7.5
NETR53_1: R53.1 U11.3
NETR54_1: R54.1 R55.2 U11.2
NETR57_1: R57.1 R58.2 U14.4
NETR57_2: R57.2 U21.39
NETR62_2: R62.2 R65.2 T3.1
NETR73_1: R73.1 U15.2
NETR78_1: R78.1 U2.2
NETR79_1: R79.1 U16.2
NETR91_2: R91.2 U18.4
NETR92_2: R92.2 U19.6 U19.7
NETR93_1: R93.1 U5.E2
NETR96_1: R96.1 R97.1 U20.5
NETR96_2: R96.2 U19.1 U19.2
NETR97_2: R97.2 U20.1 U20.2
NETR101_1: R101.1 R105.1
NETR112_1: R112.1 U21.44
NETR113_1: R113.1 U21.45
NETR124_1: R124.1 SB1.1 T1.1
NETSB16_2: SB16.2 U14.5
NETSB17_1: SB17.1 U1.4 U2.4 U16.1 U17.1
NETSB24_2: SB24.2 U21.41
OSC_IN: C20.2 U6.5 X2.2
OSC_OUT: C23.2 U6.6 X2.1
PMOD#1: CN2.1 CN3.1 U5.E6
PMOD#2: CN2.2 CN3.2 SB4.2 SB7.2
PMOD#3: CN2.3 CN3.3 SB5.2 SB8.2
PMOD#4: CN2.4 CN3.4 SB6.2 SB9.2
PMOD#11: CN2.11 CN3.7 U5.A2
PMOD#12: CN2.12 CN3.8 U5.N5
PSRAM_A0: U4.A3 U5.F5
PSRAM_A1: U4.A4 U5.F4
PSRAM_A2: U4.A5 U5.F3
PSRAM_A3: U4.B3 U5.G3
PSRAM_A4: U4.B4 U5.G4
PSRAM_A5: U4.C3 U5.G5
PSRAM_A6: U4.C4 U5.N6
PSRAM_A7: U4.D4 U5.M6
PSRAM_A8: U4.H2 U5.L6
PSRAM_A9: U4.H3 U5.K6
PSRAM_A10: U4.H4 U5.J6
PSRAM_A11: U4.H5 U5.H6
PSRAM_A12: U4.G3 U5.J12
PSRAM_A13: U4.G4 U5.J11
PSRAM_A14: U4.F3 U5.J10
PSRAM_A15: U4.F4 U5.J9
PSRAM_A16: U4.E4 U5.K12
PSRAM_A17: U4.D3 U5.K11
PSRAM_A18: CN6.21 U4.H1 U5.K13
PSRAM_NBL0: U4.A1 U5.A4
PSRAM_NBL1: R13.1 U4.B2 U5.B4
PSRAM_NE: JP9.1 R12.2 U5.B7
PSRAM_VDD: R13.2 R14.2 R15.1 R129.1 R130.1 SB12.2
PWR_ENN: R32.2 U6.28 U7.3
QSPI_BK1_IO0: R8.1 U5.L5
QSPI_BK1_IO1: R28.1 U5.K5
QSPI_BK1_IO2: R29.1 U5.L4
QSPI_BK1_IO3: R6.1 U5.M4
QSPI_BK1_NCS: R26.1 U5.H8
QSPI_CLK: R7.1 U5.M2
SAI1_FSA: U5.D1 U18.1
SAI1_MCKA: U5.D3 U18.30
SAI1_SCKA: U5.N9 U18.31
SAI1_SDA: U5.E3 U18.32
SAI1_SDB: U5.D2 U18.29
SH0: R84.2 T4.3 U21.4
SH0_D: R85.2 T4.1 T4.2 T4.5 T4.6
SH1: R106.2 T7.3 U21.5
SH1_D: R107.2 T7.1 T7.2 T7.5 T7.6
SH2: R110.2 T9.3 U21.6
SH2_D: R111.2 T9.1 T9.2 T9.5 T9.6
SPI2_CLK: SB9.1 U5.B11
SPI2_MISO: SB5.1 U5.B10
SPI2_MISOS: CN2.9 U5.E8
SPI2_MOSI: SB4.1 U5.M12
SPI2_MOSIS: CN2.8 U5.C10
STL_USB_DM: CN5.2 U6.32 U22.1 U22.6
STL_USB_DP: CN5.3 R37.2 U6.33 U22.3 U22.4
STLINK_RX: U6.13 U11.7
STLINK_TX: R46.1 U6.12
STM_JTCK: CN14.2 U6.37
STM_JTMS: CN14.4 U6.34
STM_RST: C24.1 JP10.1 U6.7
STMOD+_ADC: CN2.13 U5.L3
STMOD+_PWM: CN2.14 U5.K3
SWCLK: R4.2 R47.1 U5.A10
SWDIO: R5.2 SW1.8 U5.A11
SWO: R16.2 R51.1 U5.A6
SWO_MCU: R51.2 R56.2 U8.6
T50_4: JP2.1 R85.1 T5.4
T50_6: R95.1 R107.1 R111.1 T5.1 T5.2 T5.5 T5.6 U19.5
T_JRST: U6.19
T_JTCK: R47.2 R66.2 U6.15 U6.26
T_JTDI: U6.17
T_JTDO: SB13.2 U6.16 U8.3
T_JTMS: R63.2 SW1.1 U6.27 U8.7
T_NRST: R59.2 SW1.2 U6.18
T_SWDIO_IN: U6.25 U8.2
T_SWO: SB13.1 U6.31
U5V_ST_LINK: C29.2 Designator1.1@699.22,2431.89 U7.6 U7.7
UART1_RTS: SB6.1 U5.F6
UART1_RX: SB8.1 U5.D6
UART1_TX: SB7.1 U5.C5
USART2_RX: R46.2 U5.E7
USART2_TX: R55.1 U5.N1
USB_OTGFS_ID: CN8.4 D5.1 U5.F9
USB_OTGFS_OVRCR: LD7.2 R64.2 U14.3 U21.17
USB_OTGFS_VBUS: C54.1 CN8.1 D4.1 D5.6 Designator1.5 R62.1 U5.F10 U14.1
USB_RENUMN: R35.2 U6.38
USD_CLK: CN17.5 U5.F8
USD_CMD: CN17.3 R120.1 U5.D8
USD_D0: CN17.7 R121.1 U5.G10
USD_D1: CN17.8 R122.1 U5.G9
USD_D2: CN17.1 R118.1 U5.D9
USD_D3: CN17.2 R119.1 U5.E9
USD_DETECT: CN17.10 U21.29
VDD: C60.1 C61.1 CN1.20 CN1.30 CN4.1 CN15.2 CN17.4 Designator1.2@225.2,2537.4 R21.1 R27.2 R42.1 R43.1 R60.1 R94.2 R114.1 R118.2 R119.2 R120.2 R121.2 R122.2 SB3.1 SB18.1 SW1.5 T8.4 T11.4
VDD1: C93.1 C101.1 C102.1 C103.1 CN9.1 JP2.3 L8.1 R114.2 T4.4 T6.4 U21.1 U21.24 U21.36 U21.48
VDD_LCD: C82.1 C104.1 CN6.25 R52.2 R87.2 R88.1 R117.1 R129.2 SB14.1 SB21.2 T11.1 T11.2 T11.5 T11.6
VDD_MCU: C6.1 C12.1 C17.1 C18.1 C21.1 C22.1 C25.1 C26.1 C27.1 C28.1 C81.1 C89.1 C97.1 C98.1 JP2.2 JP4.3 R93.2 SB24.1 U5.A3 U5.A8 U5.B6 U5.C1 U5.C13 U5.F12 U5.G2 U5.G13 U5.H13 U5.L12 U5.N3 U5.N7 U5.N11
VDD_STL: C34.1 C46.1 JP6.2 R45.2 R53.2 R54.2 U8.8 U11.1 U11.5
VDDA: C7.1 C8.1 L1.2 R18.2 U5.L2
VIN: C45.1 CN15.8 U10.3
VL: C56.1 C57.1 C58.1 L6.2 L7.1 U15.1
VREF+: C3.1 C13.1 C14.1 R18.1 SB2.2 U5.L1
pads on no net: "B2. " "CN4. " "CN6. " "CN12. " "CN17. " "SW1. " "U16. " "U17. " B2.7 B2.8 CN1.2 CN1.3 CN1.12 CN1.13 CN1.18 CN1.22 CN1.24 CN1.31 CN1.32 CN3.9 CN3.10 CN4.7 CN4.8 CN4.9 CN12.5 CN12.7 CN13.11 CN13.12 CN17.11 CN17.12 CN17.13 CN17.14 U4.E3 U4.G2 U4.H6 U6.4 U6.11 U6.14 U6.21 U6.22 U6.40 U6.41 U6.42 U6.43 U6.45 U6.46 U11.6 U15.5 U18.19 U18.20 U18.23 U18.24 U21.10 U21.12 U21.13 U21.14 U21.15 U21.18 U21.26 U21.27 U21.28 U21.30 U21.31 U21.32 U21.33 U21.38 U23.E1 U24.E1

## Keep-outs
TOP:
  circle w1: c328.1,2300 r65
  circle w1: c4453.1,2533 r60
  circle w1: c4453.1,2533 r65
  circle w1: c263.1,460 r65
  circle w1: c263.1,460 r60
  circle w1: c328.1,2300 r60
  circle w1: c328.1,2300 r65
  circle w1: c4453.1,2533 r60
  circle w1: c4453.1,2533 r65
  circle w1: c263.1,460 r65
  circle w1: c263.1,460 r60
  lines w1: 387.88,2305.14 ccw(c328.1,2300) 388.1,2300
BOTTOM:
  circle w1: c4478.1,105 r65
  circle w1: c4478.1,105 r60
  circle w1: c4453.1,2533 r65
  circle w1: c4453.1,2533 r60
  circle w1: c263.1,460 r60
  circle w1: c263.1,460 r65
  circle w1: c4478.1,105 r65
  circle w1: c4478.1,105 r60
  circle w1: c4453.1,2533 r65
  circle w1: c4453.1,2533 r60
  circle w1: c263.1,460 r60
  circle w1: c263.1,460 r65
Drill Drawing:
  lines w1: 0,78.74 ccw(c78.74,78.74) 78.74,0 ; 0,1025.71 cw(c20,1025.71) 20,1045.71 ; 0,1541.93 ccw(c20,1541.93) 20,1521.93 ; 0,2559.05 cw(c78.74,2559.05) 78.74,2637.79 ; 100,1045.71 ccw(c100,1065.71) 120,1065.71 ; 100,1521.93 cw(c100,1501.93) 120,1501.93 ; 5039.36,0 ccw(c5039.36,78.74) 5118.1,78.74 ; 5039.36,2637.79 cw(c5039.36,2559.05) 5118.1,2559.05

## Other copper
TOP:
  text "1" at 1474,106 h35
  text "B" at 1498,29 h35
  text "GENERATED BY AUTOCURO" at 0,-1000 h200
BOTTOM:
  text "6" at 1848,107 h35
  text "6" at 1848,107 h35
  text "B" at 1848,26 h35
  text "B" at 1848,26 h35

## Silkscreen, mask and mechanical layers (free items; w line width, h text height)
Top Overlay:
  drawing of 3700 lines, arcs and shapes, not listed
  text "STMod+" at 3580,2410 h35 r90
  text "PMOD" at 4610,2340 h35
  text "Camera" at 2095,2305 h35
  text "www.st.com/stm32l4-discovery" at 408,2303 h40
  text "STM32L496G-DISCO" at 423,2162 h80
  text "MB1261B" at 1033.3,2084.3 h50
  text "IDD" at 2975,1900 h35
  text "VDD" at 3215,1900 h35
  text "TAG" at 3960,1855 h35 r90
  text "USB" at 4898.9,1493 h35
  text "STLINK" at 4895,1445 h35
  text "LCD" at 1919.59,1128.45 h35
  text "ARD_5V_OUT" at 2380,995 h35 r90
  text "ARD_5V_IN" at 2560,995 h35 r90
  text "VDD_SWD" at 5105,875 h35 r90
  text "+3V3" at 3645,845 h35
  text "+1V8" at 3885,840 h35
  text "+3V3" at 2985,835 h35
  text "VDD_MCU" at 3235,835 h35
  text "VDD_MCU" at 5105,635 h35 r90
  text "U" at 690,470 h50
  text "L" at 342,283 h50
  text "R" at 843,282 h50
  text "OTG FS" at 3049.1,133.9 h35
  text "D" at 480,115 h50
  text "S" at 1402,107 h35
  text "S" at 1402,107 h35
  text "COM" at 4380,80 h35 r90
  text "RESET" at 1133,49 h50
  text "JOYSTICK" at 390,45 h50
  text "B" at 1402,26 h35
  text "B" at 1402,26 h35
  text "SWD" at 5040,25 h35 r90
  text "E5V" at 3680,15 h35 r90
  text "U5V" at 3790,15 h35 r90
  text "ARD" at 3880,15 h35 r90
  text "STLK" at 3590,0 h35 r90
  text "CHGR" at 3980,0 h35 r90
Bottom Overlay:
  lines w6: 241.92,1067.28 ccw(c261.6,1067.28) 261.6,1047.6 ; 241.92,1500.35 cw(c261.6,1500.36) 261.6,1520.04 ; 428.93,1520.04 ccw(c428.93,1539.72) 448.61,1539.72 ; 448.61,1677.52 cw(c468.29,1677.52) 468.3,1697.2 ; 556.88,1047.6 ccw(c556.88,1067.28) 576.56,1067.28 ; 576.56,1500.35 cw(c596.25,1500.35) 596.25,1520.04 ; 645.46,1520.04 ccw(c645.46,1539.73) 665.15,1539.72 ; 645.46,1697.2 cw(c645.47,1677.52) 665.15,1677.52
  text "D12" at 2855,2405 h35 r225
  text "GND" at 3045,2395 h35 r225
  text "D14" at 3250,2395 h35 r225
  text "D0" at 1635,2385 h35 r270
  text "D1" at 1735,2385 h35 r270
  text "D2" at 1835,2385 h35 r270
  text "D4" at 2035,2385 h35 r270
  text "D5" at 2130,2385 h35 r270
  text "D6" at 2235,2385 h35 r270
  text "D7" at 2340,2385 h35 r270
  text "D8" at 2495,2385 h35 r270
  text "D9" at 2595,2385 h35 r270
  text "D10" at 2695,2385 h35 r270
  text "D11" at 2800,2385 h35 r270
  text "D13" at 2985,2385 h35 r270
  text "D3" at 1944,2383 h35 r270
  text "D15" at 3390,2370 h35 r270
  text "AVDD" at 3190,2330 h35 r270
  text "Rev.B" at 3781,1925 h40 r270
  text "Audio Jack" at 340,1745 h35
  text "CTP" at 428.1,1615 h35
  text "MB1261" at 3776,1590 h50 r270
  text "GND" at 4830,1460 h35 r225
  text "+3V3" at 4588,1430 h35 r225
  text "SWDIO" at 4895,1415 h35 r225
  text "SWCLK" at 4680,1410 h35 r225
  text "SWO" at 5070,606 h35
  text "NRST" at 5097,499 h35
  text "SWDIO" at 5117,394 h35
  text "GND" at 5069,303 h35
  text "SWCLK" at 5120,198 h35
  text "5V" at 2635,180 h35 r270
  text "A5" at 1635,175 h35 r270
  text "A4" at 1730,175 h35 r270
  text "A3" at 1830,175 h35 r270
  text "A2" at 1935,175 h35 r270
  text "A1" at 2035,175 h35 r270
  text "A0" at 2130,175 h35 r270
  text "GND" at 2435,145 h35 r270
  text "GND" at 2535,145 h35 r270
  text "VIN" at 2330,140 h35 r270
  text "3V3" at 2720,140 h35 r270
  text "NRST" at 2843,120 h35 r270
  text "B" at 1919,106 h35
  text "B" at 1919,106 h35
  text "VDD" at 5070,98 h35
  text "IOREF" at 2900,90 h35 r270
  text "uSD" at 1400,36.9 h35 r270
  text "B" at 1919,25 h35
  text "B" at 1919,25 h35
  text "E5V" at 3645,15 h35 r270
  text "U5V" at 3752,15 h35 r270
  text "ARD" at 3845,15 h35 r270
  text "STLK" at 3555,0 h35 r270
  text "CHGR" at 3945,0 h35 r270
LCD_MB1166:
  circle w1: c4911.1,2146.13 r177
  circle w1: c4911.1,2146.13 r177
  circle w1: c4911.1,661.72 r88.5
  circle w1: c4911.1,661.72 r88.5
  circle w1: c4448.1,2106.96 r20
  circle w1: c4518.1,136.96 r30
  circle w1: c4518.1,136.96 r30
  circle w1: c1991.88,221.06 r20
  circle w1: c1991.88,221.06 r20
  circle w1: c1558.1,546.96 r3
  circle w1: c1558.1,606.96 r3
  circle w1: c1633.1,545.98 r3
  circle w1: c1633.1,605.98 r3
  circle w1: c1372.12,916.96 r30
  circle w1: c1372.12,916.96 r30
  circle w1: c1264.32,221.06 r20
  circle w1: c1264.32,221.06 r20
  circle w1: c1052.12,1591.96 r30
  circle w1: c1052.12,1591.96 r30
  circle w1: c987.12,916.96 r30
  circle w1: c987.12,916.96 r30
  circle w1: c325.11,2146.13 r177
  circle w1: c325.11,2146.13 r177
  circle w1: c603.1,2146.96 r20
  circle w1: c603.1,95.98 r30
  circle w1: c603.1,95.98 r30
  circle w1: c325.11,661.72 r88.5
  circle w1: c325.11,661.72 r88.5
  circle w1: c293.1,96.96 r20
  lines w1: 768.1,0 ccw(c768.1,10) 778.1,10 ; 778.1,40.66 cw(c788.1,40.66) 788.1,50.66 ; 1163.1,50.66 cw(c1163.1,40.66) 1173.1,40.66 ; 1173.1,10 ccw(c1183.1,10) 1183.1,0 ; 4614.36,0 ccw(c4614.36,10) 4624.36,10 ; 4624.36,865.97 cw(c4674.36,865.97) 4674.36,915.97 cw(c4674.36,865.97) 4724.36,865.97 ; 4724.36,10 ccw(c4734.36,10) 4734.36,0
  lines w5: 1022.12,951.96 ccw(c1047.12,993.1) 1072.12,951.96 ; 1022.12,1051.96 cw(c1047.12,1010.82) 1072.12,1051.96 ; 1082.12,951.96 ccw(c1107.12,993.1) 1132.12,951.96 ; 1082.12,1051.96 cw(c1107.12,1010.82) 1132.12,1051.96 ; 1082.12,1301.96 ccw(c1107.12,1343.1) 1132.12,1301.96 ; 1082.12,1401.96 cw(c1107.12,1360.82) 1132.12,1401.96 ; 1142.12,1301.96 ccw(c1167.12,1343.1) 1192.12,1301.96 ; 1142.12,1401.96 cw(c1167.12,1360.82) 1192.12,1401.96 ; 1202.12,1301.96 ccw(c1227.12,1343.1) 1252.12,1301.96 ; 1202.12,1401.96 cw(c1227.12,1360.82) 1252.12,1401.96 ; 3898.1,226.96 cw(c3939.24,251.96) 3898.1,276.96 ; 3898.1,281.96 cw(c3939.24,306.96) 3898.1,331.96 ; 3898.1,336.96 cw(c3939.24,361.96) 3898.1,386.96 ; 3998.1,226.96 ccw(c3956.96,251.96) 3998.1,276.96 ; 3998.1,281.96 ccw(c3956.96,306.96) 3998.1,331.96 ; 3998.1,336.96 ccw(c3956.96,361.96) 3998.1,386.96
  lines w6: 4133.81,861.02 cw(c4153.49,861.02) 4153.5,880.7 ; 4271.61,447.63 cw(c4310.98,447.63) 4310.98,487 ; 4507.83,487 ccw(c4507.82,506.69) 4527.51,506.69 ; 4507.83,880.7 cw(c4507.83,861.02) 4527.51,861.02 ; 4527.51,546.06 cw(c4547.19,546.06) 4547.2,565.74 ; 4527.51,821.65 ccw(c4547.2,821.65) 4547.2,801.96 ; 562.79,95.98 ccw(c603.1,95.98) 643.41,95.98 ccw(c603.1,95.98) 562.79,95.98 ; 946.81,916.96 ccw(c987.12,916.96) 1027.43,916.96 ccw(c987.12,916.96) 946.81,916.96 ; 1011.81,1591.96 ccw(c1052.12,1591.96) 1092.43,1591.96 ccw(c1052.12,1591.96) 1011.81,1591.96 ; 1331.81,916.96 ccw(c1372.12,916.96) 1412.43,916.96 ccw(c1372.12,916.96) 1331.81,916.96 ; 4477.79,136.96 ccw(c4518.1,136.96) 4558.41,136.96 ccw(c4518.1,136.96) 4477.79,136.96
  text "10" at 1403.1,520.98 h25 r180
  text "20" at 1498.1,520.98 h25 r180
  text "30" at 1598.1,520.98 h25 r180
  text "40" at 1698.1,520.98 h25 r180
  text "50" at 1798.1,520.98 h25 r180
  text "60" at 1893.1,520.98 h25 r180
  text "2" at 1333.1,510.98 h25 r180
  text "25" at 851.46,279.35 h35 r180
  text "1" at 1070.46,274.35 h35 r180
  text "59" at 1898.1,115.98 h25 r180
LAY4:
  text "4" at 1710,105 h35
  text "B" at 1684,25 h35
  text "B" at 1684,25 h35
DIMENSION:
  text "48.26mm" at 5226.57,1246.87 h85
  text "48.26mm" at 5226.57,1246.87 h85
  text "57.53mm" at 5848.2,1240.11 h85
  text "57.53mm" at 5848.2,1240.11 h85
  text "4.95mm" at 5655.47,38.21 h85
  text "4.95mm" at 5655.47,38.21 h85
LAY5:
  text "5" at 1778,107 h35
  text "5" at 1778,107 h35
  text "B" at 1778,26 h35
  text "B" at 1778,26 h35
LAY3:
  text "3" at 1612,105 h35
  text "3" at 1612,105 h35
  text "B" at 1612,24 h35
  text "B" at 1612,24 h35
LAY2:
  text "2" at 1546,106 h35
  text "2" at 1546,106 h35
  text "B" at 1546,25 h35
  text "B" at 1546,25 h35
DXF_0731:
  lines w5: 3.34,677.52 ccw(c82.08,677.52) 82.08,598.78 ; 3.34,1892.48 cw(c82.08,1892.48) 82.08,1971.22 ; 241.92,1067.28 ccw(c261.6,1067.28) 261.6,1047.6 ; 241.92,1500.35 cw(c261.6,1500.36) 261.6,1520.04 ; 428.93,1520.04 ccw(c428.93,1539.72) 448.61,1539.72 ; 448.61,1677.52 cw(c468.29,1677.52) 468.3,1697.2 ; 556.88,1047.6 ccw(c556.88,1067.28) 576.56,1067.28 ; 576.56,1500.35 cw(c596.25,1500.35) 596.25,1520.04 ; 645.46,1520.04 ccw(c645.46,1539.73) 665.15,1539.72 ; 645.46,1697.2 cw(c645.47,1677.52) 665.15,1677.52 ; 1604.12,598.78 ccw(c1604.12,677.52) 1682.86,677.52 ; 1604.12,1971.22 cw(c1604.12,1892.48) 1682.86,1892.48
  text "Sofer Lib Information" at 641.31,2384.09 h25
  text "Ref PN: FRD154BP2902-CTP" at 671.31,2334.09 h25
  text "Creat : Ziv" at 671.31,2294.09 h25
  text "Date  : 2016-05-28" at 671.31,2254.09 h25
  text "Rev   : A1" at 671.31,2214.09 h25
  text "Remark: D031-023A1" at 671.31,2174.09 h25
  text "42.66" at 838.1,2062 h16
  text "31.52" at 838.1,2032 h16
  text "28.32" at 838.1,1997 h16
  text "11.31" at 88.1,1627 h16
  text "33.72" at 123.1,1362 h16
  text "28.32" at 313.1,1352 h16
  text "NO" at 815.1,1285 h35
  text "U888" at 789.1,1245 h40
  text "15" at 1746.1,1060.98 h16
  text "9" at 2052.1,825.98 h16
  text "1" at 77.1,492 h16
  text "LCD_FRD154BP2902-CTP" at 623.1,445 h30
  text "Value" at 788.1,445 h30